# Altium PCB Copy of PCB_Controlev2.PcbDoc
Units mm, origin at the board's own origin, x right, y up, seen from the top; angles counter-clockwise.
Board outline 100 x 65 mm, 2 copper layers (Top Layer, Bottom Layer); 12 components, 36 nets, 118 pads, 4 vias.
Unrouted connection lines stored in the file: 1.
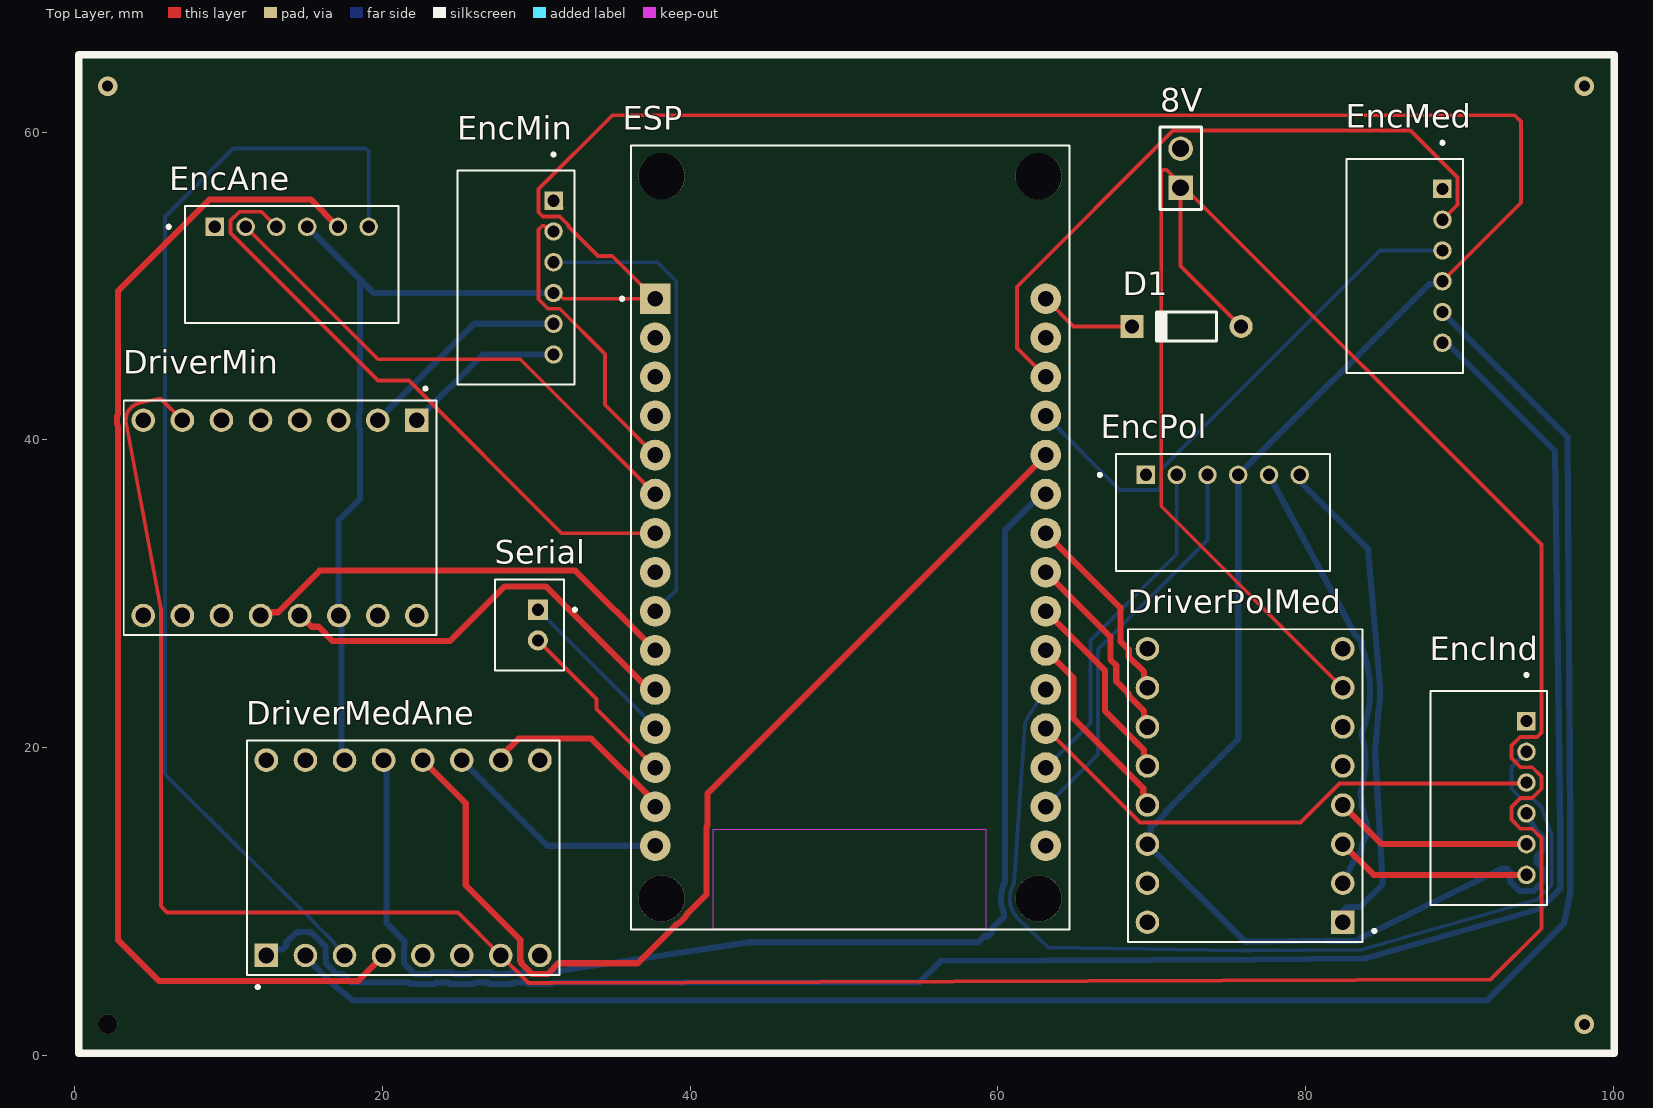
[diagram p0: Top Layer view]
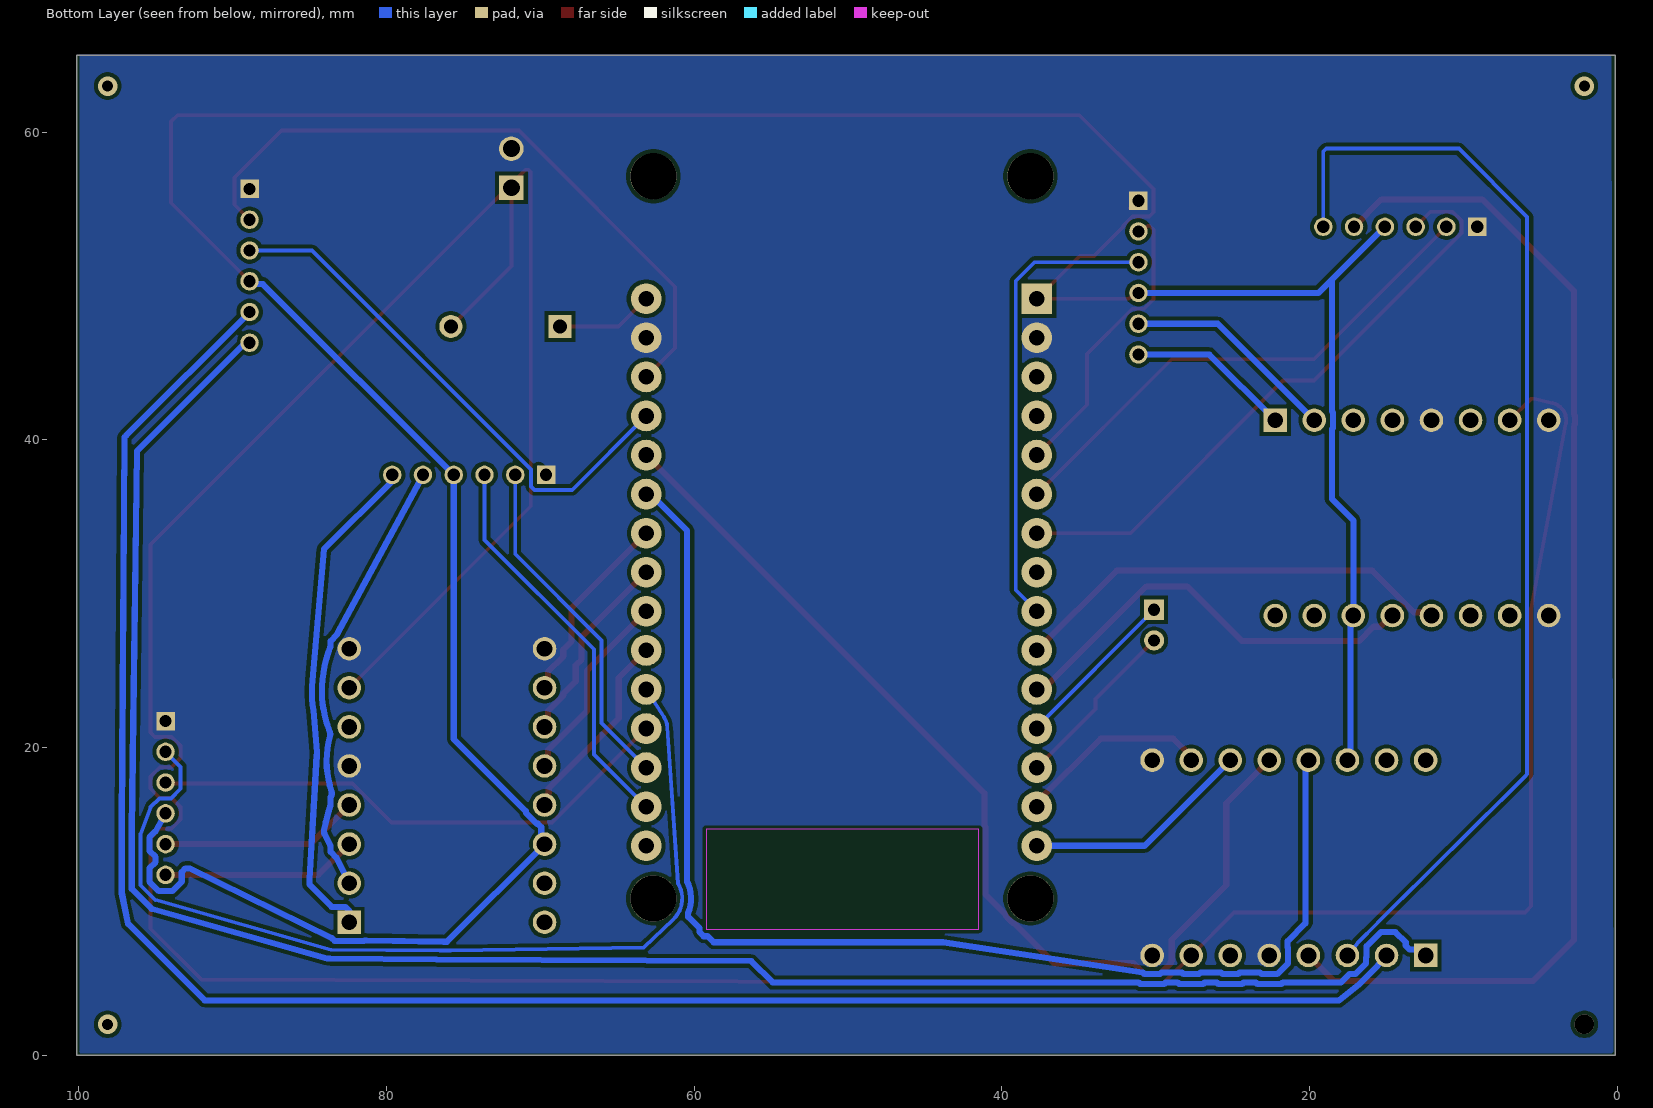
[diagram p1: Bottom Layer view, seen from below]

## Layer stack, top to bottom
Top Solder: solder mask 0.0102, Solder Resist, Dk 3.5
Top Layer: signal copper 0.0356
Dielectric 1: dielectric 0.32, FR-4, Dk 4.8
Bottom Layer: signal copper 0.0356
Bottom Solder: solder mask 0.0102, Solder Resist, Dk 3.5

## Board outline
0.127,0 100.127,0 100.127,65 0.127,65

## Design rules (kind name [scope] priority, off if disabled: settings)
Clearance [All] p1: gap=0.25 ignorepadtopadclearanceinfootprint=FALSE
HoleSize [All] p1: absolutevalues=TRUE maxlimit=1.2 minlimit=0.4 maxpercent=80.000 minpercent=20.000
PolygonConnect [All] p1: connectstyle=Direct reliefconductorwidth=0.254 reliefentries=4 polygonreliefangle="90 Angle" airgapwidth=0.254
RoomDefinition Sheet_Control [InComponentClass('Sheet_Control')] p1: confinementstyle=ConfineIn formatcopy=TRUE lockcomponents=FALSE outline 2.032,2.921 98.425,2.921 98.425,62.865 2.032,62.865
RoutingVias [All] p1: holewidth=0.4 width=1.2 viastyle="Through Hole" minholewidth=0.4 minwidth=1.2 maxholewidth=10 maxwidth=10
SilkToSilkClearance [All] p1: silktosilkclearance=0.25
SolderMaskExpansion [All] p1: expansion=0.102 istentingtop=FALSE
Width [All] p1: maxlimit=10 minlimit=0.25 preferedwidth=0.25
28 further rules are at their usual default settings.

## Components (designator, comment, footprint, x,y, rotation, side; value= is the part's Value field where it differs from the comment)
8V "61300211121" 61300211121 71.882,57.658 r90 top
D1 "Diode 1N4148" DO-35 72.263,47.371 r180 top (schematic designator D?)
DriverMedAne "A4990_STEPPER_MOTOR_DRIVER_CARRIER" MODULE_A4990_STEPPER_MOTOR_DRIVER_CARRIER 21.336,12.827 r90 top
DriverMin "A4990_STEPPER_MOTOR_DRIVER_CARRIER" MODULE_A4990_STEPPER_MOTOR_DRIVER_CARRIER 13.335,34.925 r270 top
DriverPolMed "A4990_STEPPER_MOTOR_DRIVER_CARRIER" MODULE_A4990_STEPPER_MOTOR_DRIVER_CARRIER 76.073,17.526 r180 top
EncAne "S6B-PH-K-S(LF)(SN)" JST_S6B-PH-K-S(LF)(SN) 14.097,53.848 r0 top
EncInd "S6B-PH-K-S(LF)(SN)" JST_S6B-PH-K-S(LF)(SN) 94.361,16.716 r270 top
EncMed "S6B-PH-K-S(LF)(SN)" JST_S6B-PH-K-S(LF)(SN) 88.9,51.308 r270 top
EncMin "S6B-PH-K-S(LF)(SN)" JST_S6B-PH-K-S(LF)(SN) 31.115,50.546 r270 top
EncPol "S6B-PH-K-S(LF)(SN)" JST_S6B-PH-K-S(LF)(SN) 74.628,37.719 r0 top
ESP "ESP32-DEVKIT-V1" ESP32_DEVKIT_V1 50.419,33.655 r0 top
Serial "B2B-PH-K-S" JST_B2B-PH-K-S 29.549,27.956 r90 top

## Footprints (in the part's own frame and the unit in brackets; to place one, negate y for a bottom-side part, rotate by r counter-clockwise, add the part's x,y. Pads: shape width x height; smd on the part's side, far side on the other; paste and mask are expansions set on the pad)
61300211121 [mm] "Pin Header, pitch 2.54 mm, THT, Vertical, single row, 2p"
  rect 1.6x1.6 hole 1.1: 1(-1.27,0)
  round 1.6 hole 1.1: 2(1.27,0)
  silkscreen extent -2.69,-1.35 2.69,1.35, body extent -2.54,-1.27 2.54,1.27, height 8.57
DO-35 [mm] "Diode, Axial; Body 3.8 x 1.9 mm (LxDia. max), Lead Dia. 0.53 mm (max)"
  round 1.5 hole 0.9: 1(-3.55,0)
  rect 1.5x1.5 hole 0.9: 2(3.55,0)
  silkscreen extent -1.95,-0.95 2.05,0.95, body extent -4.06,-1.27 4.06,1.22, height 3.23
ESP32_DEVKIT_V1 [mm]
  rect 2x2 hole 1.02: 1(-12.7,15.515)
  round 2 hole 1.02: 2(-12.7,12.975) 3(-12.7,10.435) 4(-12.7,7.895) 5(-12.7,5.355) 6(-12.7,2.815) 7(-12.7,0.275) 8(-12.7,-2.265) 9(-12.7,-4.805) 10(-12.7,-7.345) 11(-12.7,-9.885) 12(-12.7,-12.425) 13(-12.7,-14.965) 14(-12.7,-17.505) 15(-12.7,-20.045) 16(12.7,-20.045) 17(12.7,-17.505) 18(12.7,-14.965) 19(12.7,-12.425) 20(12.7,-9.885) 21(12.7,-7.345) 22(12.7,-4.805) 23(12.7,-2.265) 24(12.7,0.275) 25(12.7,2.815) 26(12.7,5.355) 27(12.7,7.895) 28(12.7,10.435) 29(12.7,12.975) 30(12.7,15.515)
  round 3 hole 3 unplated: ""(-12.28,-23.475) ""(-12.28,23.475) ""(12.23,-23.475) ""(12.23,23.475)
  Keep-Out Layer region: 8.78,-25.475 -8.91,-25.475 -8.91,-18.985 8.78,-18.985
  Keep-Out Layer region: 8.78,-25.475 -8.91,-25.475 -8.91,-18.985 8.78,-18.985
  Keep-Out Layer region: 8.78,-25.475 -8.91,-25.475 -8.91,-18.985 8.78,-18.985
  silkscreen extent -14.95,-25.48 14.23,25.48, body extent -14.48,-25.5 14.02,25.43, height 9.22
JST_B2B-PH-K-S [mm]
  rect 1.308x1.308 / inner round 1.308 / far side rect 1.308x1.308 hole 0.8: 1(1,-0.55)
  round 1.308 hole 0.8: 2(-1,-0.55)
  silkscreen extent -2.95,-3.05 2.95,2.25, body extent -2.95,-2.25 2.95,2.25, height 6
JST_S6B-PH-K-S(LF)(SN) [mm]
  rect 1.2x1.2 hole 0.8: 1(-5,0)
  round 1.2 hole 0.8: 2(-3,0) 3(-1,0) 4(1,0) 5(3,0) 6(5,0)
  silkscreen extent -8.1,-6.25 6.95,1.35
MODULE_A4990_STEPPER_MOTOR_DRIVER_CARRIER [mm]
  rect 1.53x1.53 hole 1.02: 1(-6.35,8.89)
  round 1.53 hole 1.02: 2(-6.35,6.35) 3(-6.35,3.81) 4(-6.35,1.27) 5(-6.35,-1.27) 6(-6.35,-3.81) 7(-6.35,-6.35) 8(-6.35,-8.89) 9(6.35,-8.89) 10(6.35,-6.35) 11(6.35,-3.81) 12(6.35,-1.27) 13(6.35,1.27) 14(6.35,3.81) 15(6.35,6.35) 16(6.35,8.89)
  silkscreen extent -8.5,-10.16 7.62,10.16

## Part data
8V: "WR-PHD Pin Header, THT, pitch 2.54mm, Single Row, Vertical, 2pin", Contact Resistance=20mOhm, Operating Temperature="-40 to +105degC", Rated Current=3A, Withstanding Voltage=500VAC, Working Voltage=250VAC, ComponentLink1Description=Manufacturer, ComponentLink1URL=http://www.we-online.de, ComponentLink2Description=Datasheet, ComponentLink2URL=https://katalog.we-online.de/em/datasheet/6130xx11121.pdf, Gender=Male, Mounting Technology=THT, Orientation=Vertical, Packaging=Bag, Part Number=61300211121, Pin Number=2, Pitch=2.54mm, Published Date="June 2019", Publisher="Wurth Elektronik", Row Number=Single
D1: "High Conductance Fast Diode", Code_JEDEC=DO-204-AH, ComponentLink1Description="Manufacturer Link", ComponentLink1URL=http://www.fairchildsemi.com/, ComponentLink2Description=Datasheet, ComponentLink2URL=http://www.fairchildsemi.com/ds/1N%2F1N4148.pdf, DatasheetVersion=1997, LatestRevisionDate=17-Jul-2002, LatestRevisionNote="Re-released for DXP Platform.", PackageDescription="Diode, Axial; Body 3.8 x 1.9 mm (LxDia. max), Lead Dia. 0.53 mm (max)", PackageReference=DO-35, Published=8-Jun-2000, Publisher="Altium Limited"
DriverMedAne DriverMin DriverPolMed: "Stepper motor controler; IC: A4990", Package=None, Availability=Unavailable, MP=A4988_STEPPER_MOTOR_DRIVER_CARRIER, Price=None
EncAne EncInd EncMed EncMin EncPol: "PH Series 6 Position 2 mm Pitch Through Hole Side Entry Shrouded Header", Package=None, Availability=Unavailable, MP=S6B-PH-K-S(LF)(SN), Price=None
ESP: "Dual core, Wi-Fi: 2.4 GHz up to 150 Mbits/s,BLE (Bluetooth Low Energy) and legacy Bluetooth, 32 bits, Up to 240 MHz", Package=None, Availability="Not in stock", Check_prices=https://www.snapeda.com/parts/ESP32-DEVKIT-V1/Do+it/view-part/?ref=eda, MF="Do it", MP=ESP32-DEVKIT-V1, Price=None, SnapEDA_Link=https://www.snapeda.com/parts/ESP32-DEVKIT-V1/Do+it/view-part/?ref=snap
Serial: "Connector Header Through Hole 2 position 0.079 (2.00mm)", Package=None, Check_prices=https://www.snapeda.com/parts/B2B-PH-K-S/JST/view-part/?ref=eda, MF="JST Sales America Inc.", MP=B2B-PH-K-S, SnapEDA_Link=https://www.snapeda.com/parts/B2B-PH-K-S/JST/view-part/?ref=snap

## Via types
v1: diameter 1.27, hole 0.711, Top Layer to Bottom Layer, 3 vias
v2: diameter 1.27, hole 1.27, Top Layer to Bottom Layer, 1 vias

## Nets (pads, with @x,y where several pads share a name; then routed paths per layer and width w, separated by ;. In a path a pad name is that pad's centre, name@x,y a point inside that pad or via, vN(x,y) a via of type N, cw(c..) or ccw(c..) an arc to the next point about the centre after c; other vN are vias at no path point)
Net8V_1: 8V.1 D1.1 DriverMedAne.7 DriverMin.7 DriverPolMed.7 | length 244.1
  Top Layer w0.25: DriverMin.7 5.661,42.599 5.588,42.672 5.381,42.672 4.179,42.384 ccw(c4.445,41.275) 3.369,40.898 5.585,29.047 5.585,9.674 5.988,9.271 24.892,9.271 DriverMedAne.7 29.292,4.871 29.485,4.687 30.967,4.687 92.032,4.91 95.336,8.214 95.336,14.12 94.74,14.716 93.982,14.716 93.386,15.312 93.386,16.12 93.982,16.716 94.74,16.716 95.336,17.312 95.336,18.12 94.74,18.716 93.982,18.716 93.386,19.312 93.386,20.12 93.957,20.691 95.066,20.691 95.336,20.961 95.336,33.188 72.009,56.515 70.971,57.553 70.764,57.553 70.618,57.406 70.618,35.681 DriverPolMed.7 ; 8V.1 71.882,51.302 D1.1
Net8V_2: 8V.2 DriverMedAne.5 DriverMedAne.8 DriverMedAne.9 DriverMin.5 DriverMin.8 DriverMin.9 DriverPolMed.5 DriverPolMed.8 DriverPolMed.9 EncAne.1 EncInd.1 EncMed.1 EncMin.1 EncPol.1 ESP.2 ESP.29 | length 2.2
  Top Layer w0.25: DriverMedAne.9@30.226,19.158 DriverMedAne.9 ; EncMin.1 31.59,55.071 EncMin.1@31.676,55.071 ; EncPol.1 EncPol.1@69.723,37.624 ; DriverPolMed.5 DriverPolMed.5@82.635,19.008 ; DriverPolMed.8 DriverPolMed.8@82.658,26.181
  Bottom Layer w0.25: EncPol.1 EncPol.1@70.103,38.194
NetD?_2: D1.2 ESP.30 | length 6.3
  Top Layer w0.25: ESP.30 64.918,47.371 D1.2
NetDriverMedAne_1: DriverMedAne.1 EncMed.6 | length 127.5
  Bottom Layer w0.4: DriverMedAne.1 12.83,6.861 13.479,6.861 13.739,7.121 13.739,7.333 14.406,8.001 15.351,8.001 16.279,7.073 16.279,6.389 16.311,6.356 16.311,5.974 17.023,5.262 17.405,5.262 17.946,4.721 21.724,4.721 21.833,4.612 23.379,4.612 23.488,4.721 24.264,4.721 24.373,4.612 25.919,4.612 26.028,4.721 26.804,4.721 26.913,4.612 28.459,4.612 28.568,4.721 29.344,4.721 29.453,4.612 30.999,4.612 31.108,4.721 54.903,4.721 56.29,6.109 76.756,6.216 83.693,6.271 83.853,6.273 95.272,9.516 96.561,10.805 96.561,14.627 96.229,39.256 89.177,46.308 EncMed.6
NetDriverMedAne_2: DriverMedAne.2 EncMed.5 | length 128.2
  Bottom Layer w0.4: DriverMedAne.2 15.661,5.704 16.753,4.612 18.073,3.556 91.821,3.556 96.8,8.535 97.211,10.535 97.211,14.897 97.028,40.18 96.911,40.297 EncMed.5
NetDriverMedAne_3: DriverMedAne.3 EncAne.6 | length 72.9
  Bottom Layer w0.25: DriverMedAne.3 16.854,7.311 15.589,8.576 5.991,18.115 5.845,18.262 5.845,54.486 10.287,58.928 18.904,58.928 19.097,58.735 EncAne.6
NetDriverMedAne_4: DriverMedAne.4 EncAne.5 | length 78.7
  Top Layer w0.4: EncAne.5 15.319,55.626 8.763,55.626 2.794,49.657 2.794,41.739 ccw(c4.445,41.275) 2.794,40.811 2.794,7.493 5.461,4.826 18.415,4.826 DriverMedAne.4
NetDriverMedAne_10: DriverMedAne.10 ESP.14 | length 12.7
  Top Layer w0.4: DriverMedAne.10 27.686,19.413 28.847,20.574 33.573,20.574 37.719,16.428 ESP.14
NetDriverMedAne_11: DriverMedAne.11 ESP.15 | length 14.9
  Bottom Layer w0.4: DriverMedAne.11 30.713,13.61 ESP.15
NetDriverMedAne_12: DriverMedAne.12 ESP.26 | length 68.1
  Top Layer w0.4: DriverMedAne.12 25.405,16.378 25.405,11.044 28.954,7.495 28.954,6.136 29.011,6.08 29.011,5.974 29.723,5.262 30.729,5.262 31.436,5.969 36.58,5.969 39.086,8.475 ccw(c38.139,10.18) 39.844,9.233 41.059,10.448 41.059,14.856 41.134,14.931 41.134,17.025 ESP.26
NetDriverMedAne_13: DriverMedAne.13 ESP.25 | length 83.2
  Bottom Layer w0.4: DriverMedAne.13 20.258,18.985 20.258,8.571 21.415,7.414 21.415,7.004 21.391,6.98 21.391,5.974 22.103,5.262 23.109,5.262 23.218,5.371 24.534,5.371 24.643,5.262 25.649,5.262 25.758,5.371 27.074,5.371 27.183,5.262 28.189,5.262 28.298,5.371 29.614,5.371 29.723,5.262 30.729,5.262 30.838,5.371 43.821,7.339 58.739,7.339 59.13,7.73 59.385,7.73 59.649,7.994 59.649,8.249 60.39,8.99 60.39,9.155 60.39,9.233 cw(c62.649,10.18) 60.466,11.293 60.466,34.106 62.83,36.47 ESP.25
NetDriverMedAne_14: DriverMedAne.14 DriverMin.14 DriverPolMed.14 EncAne.4 EncInd.4 EncMed.4 EncMin.4 EncPol.4 ESP.1 | length 227.3
  Top Layer w0.25: EncMin.4 31.372,49.546 31.748,49.17 ESP.1 34.935,51.954 33.999,51.954 32.09,53.864 32.09,53.95 31.519,54.521 30.41,54.521 30.14,54.791 30.14,56.301 34.942,61.103 93.583,61.103 93.999,60.687 93.999,55.407 EncMed.4
  Bottom Layer w0.4: EncAne.4 18.542,50.403 ; DriverMedAne.14 17.335,19.367 17.335,28.384 DriverMin.14 17.145,34.764 18.542,36.161 18.542,40.7 18.47,40.772 18.47,41.778 18.542,41.85 18.542,50.403 ; EncMin.4 19.399,49.546 18.542,50.403 ; EncMed.4 88.718,50.126 88.035,50.126 EncPol.4 75.628,20.549 70.938,15.859 70.938,15.753 70.226,15.041 70.154,15.041 69.935,14.822 69.935,13.928 DriverPolMed.14 76.073,7.366 76.28,7.366 81.299,7.458 81.434,7.458 81.472,7.421 83.374,7.421 83.551,7.598 92.818,12.134 93.077,12.134 93.311,11.899 93.311,11.281 93.926,10.666 94.796,10.666 95.411,11.281 95.411,12.151 95.012,12.55 95.012,12.882 95.411,13.281 95.411,14.151 95.018,14.544 EncInd.4
NetDriverMin_1: DriverMin.1 EncMin.6 | length 10.7
  Bottom Layer w0.4: DriverMin.1 26.496,45.546 EncMin.6
NetDriverMin_2: DriverMin.2 EncMin.5 | length 14
  Bottom Layer w0.4: DriverMin.2 25.956,47.546 EncMin.5
NetDriverMin_12: DriverMin.12 ESP.10 | length 29
  Top Layer w0.4: DriverMin.12 12.277,28.787 13.205,28.787 15.914,31.496 32.533,31.496 ESP.10
NetDriverMin_13: DriverMin.13 ESP.11 | length 28
  Top Layer w0.4: DriverMin.13 14.677,28.575 15.404,27.847 15.836,27.847 16.764,26.919 24.379,26.919 27.932,30.472 30.592,30.472 37.295,23.77 ESP.11
NetDriverPolMed_1: DriverPolMed.1 EncPol.6 | length 32.6
  Bottom Layer w0.4: EncPol.6 79.628,37.321 84.063,32.886 84.816,24.348 cw(c75.783,23.547) 84.851,23.547 cw(c78.611,23.546) 84.747,22.412 84.517,19.692 cw(c77.74,19.104) 84.531,19.505 85.01,11.424 85.01,11.093 83.555,9.638 82.683,9.638 82.423,9.378 DriverPolMed.1
NetDriverPolMed_2: DriverPolMed.2 EncPol.5 | length 28.9
  Bottom Layer w0.4: EncPol.5 77.628,37.665 83.193,27.387 83.221,27.336 83.638,26.919 83.638,26.566 cw(c83.283,26.383) 83.656,26.527 cw(c75.783,23.547) 84.201,23.546 cw(c78.611,23.546) 84.108,22.533 cw(c74.709,24.266) 83.683,20.976 ccw(c84.059,20.84) 83.673,20.734 cw(c77.74,19.104) 83.57,17.137 ccw(c83.949,17.01) 83.638,16.759 83.638,16.246 cw(c72.706,12.546) 84.06,14.614 cw(c83.667,14.543) 84.024,14.364 83.681,13.68 83.638,13.595 83.638,13.213 83.252,12.827 83.223,12.769 DriverPolMed.2
NetDriverPolMed_3: DriverPolMed.3 EncInd.6 | length 12.8
  Top Layer w0.4: DriverPolMed.3 84.423,11.716 EncInd.6
NetDriverPolMed_4: DriverPolMed.4 EncInd.5 | length 13
  Top Layer w0.4: DriverPolMed.4 84.963,13.716 EncInd.5
NetDriverPolMed_10: DriverPolMed.10 ESP.24 | length 12.8
  Top Layer w0.4: ESP.24 67.966,29.083 67.966,26.903 68.508,26.361 68.508,25.913 69.511,24.91 69.511,24.088 DriverPolMed.10
NetDriverPolMed_11: DriverPolMed.11 ESP.23 | length 12.8
  Top Layer w0.4: ESP.23 67.316,27.193 67.316,25.715 67.691,25.34 67.691,24.296 68.508,23.479 68.508,23.373 69.511,22.37 69.511,21.548 DriverPolMed.11
NetDriverPolMed_12: DriverPolMed.12 ESP.22 | length 12.8
  Top Layer w0.4: ESP.22 66.955,25.014 66.955,22.386 69.5,19.841 69.5,19.595 69.507,19.588 69.507,19.012 DriverPolMed.12
NetDriverPolMed_13: DriverPolMed.13 ESP.21 | length 12.8
  Top Layer w0.4: ESP.21 64.899,24.53 64.899,21.901 69.45,17.351 69.45,17.055 69.507,16.999 69.507,16.472 DriverPolMed.13
NetEncAne_2: EncAne.2 ESP.6 | length 33.8
  Top Layer w0.25: EncAne.2 19.709,45.236 28.953,45.236 ESP.6
NetEncAne_3: EncAne.3 ESP.7 | length 40.1
  Top Layer w0.25: EncAne.3 12.122,54.823 10.693,54.823 10.122,54.252 10.122,53.444 19.712,43.854 21.706,43.854 31.63,33.93 ESP.7
NetEncInd_2: EncInd.2 ESP.20 | length 62.2
  Bottom Layer w0.25: ESP.20 61.963,21.974 ccw(c63.119,21.23) 61.748,21.328 61.747,21.325 61.041,11.145 ccw(c62.649,10.18) 61.358,8.821 63.271,7.003 75.825,6.801 75.835,6.791 76.518,6.791 83.613,6.846 95.034,10.091 95.986,11.043 95.986,14.389 95.336,16.12 94.765,16.691 94.007,16.691 93.386,17.312 93.386,18.741 EncInd.2
NetEncInd_3: EncInd.3 ESP.19 | length 34.9
  Top Layer w0.25: ESP.19 69.233,15.116 79.671,15.116 82.211,17.656 94.301,17.656 EncInd.3
NetEncMed_2: EncMed.2 ESP.28 | length 43.9
  Top Layer w0.25: ESP.28 61.244,45.965 61.244,49.952 71.395,60.103 86.835,60.103 89.875,57.063 89.875,55.283 EncMed.2
NetEncMed_3: EncMed.3 ESP.27 | length 34.9
  Bottom Layer w0.25: ESP.27 67.925,36.744 70.383,36.744 70.603,36.964 70.603,38.073 84.838,52.308 EncMed.3
NetEncMin_2: EncMin.2 ESP.5 | length 19.5
  Top Layer w0.25: EncMin.2 30.858,53.546 30.486,53.917 30.376,53.917 30.14,53.681 30.14,49.142 30.761,48.521 31.519,48.521 34.452,45.588 34.452,42.277 ESP.5
NetEncMin_3: EncMin.3 ESP.9 | length 30.5
  Bottom Layer w0.25: EncMin.3 37.873,51.546 39.094,50.325 39.094,30.225 ESP.9
NetEncPol_2: EncPol.2 ESP.18 | length 22.6
  Bottom Layer w0.25: ESP.18 66.018,21.589 66.018,26.958 71.628,32.567 EncPol.2
NetEncPol_3: EncPol.3 ESP.17 | length 25.9
  Bottom Layer w0.25: ESP.17 66.518,19.549 66.518,26.386 73.628,33.496 EncPol.3
NetESP_12: ESP.12 Serial.1 | length 10.9
  Bottom Layer w0.25: Serial.1 37.719,21.336 ESP.12
NetESP_13: ESP.13 Serial.2 | length 11.4
  Top Layer w0.25: Serial.2 33.914,23.141 33.914,22.495 ESP.13
pads on no net: DriverMedAne.6 DriverMedAne.15 DriverMedAne.16 DriverMin.3 DriverMin.4 DriverMin.6 DriverMin.10 DriverMin.11 DriverMin.15 DriverMin.16 DriverPolMed.6 DriverPolMed.15 DriverPolMed.16 ESP. ESP.3 ESP.4 ESP.8 ESP.16
copper on no net:
  other v1: 98.127,2 2.127,63 98.127,63
  other v2: 2.127,2

## Polygon pours and split planes (outlines as drawn)
Net8V_2 on Bottom Layer "NET8V_2_L02_P003" (solid, pour order 3): 0.381,64.897 0.508,65.024 99.949,65.024 99.949,0.254 100.076,0.127 0.254,0.127

## Silkscreen, mask and mechanical layers (free items; w line width, h text height)
Top Overlay:
  lines w0.5: 0.254,0.127 100.076,0.127 100.076,65.024 0.254,65.024 0.254,0.127